# Altium PCB BioZ.PcbDoc (part 3 of 3)
Units mm, origin at the board's own origin, x right, y up, seen from the top; angles counter-clockwise.
Board outline 88 x 75 mm, 4 copper layers (Top Layer, GND1, GND 2, Bottom Layer), stack 1.564 mm thick; 174 components, 106 nets, 519 pads, 307 vias.
Unrouted connection lines stored in the file: 5.
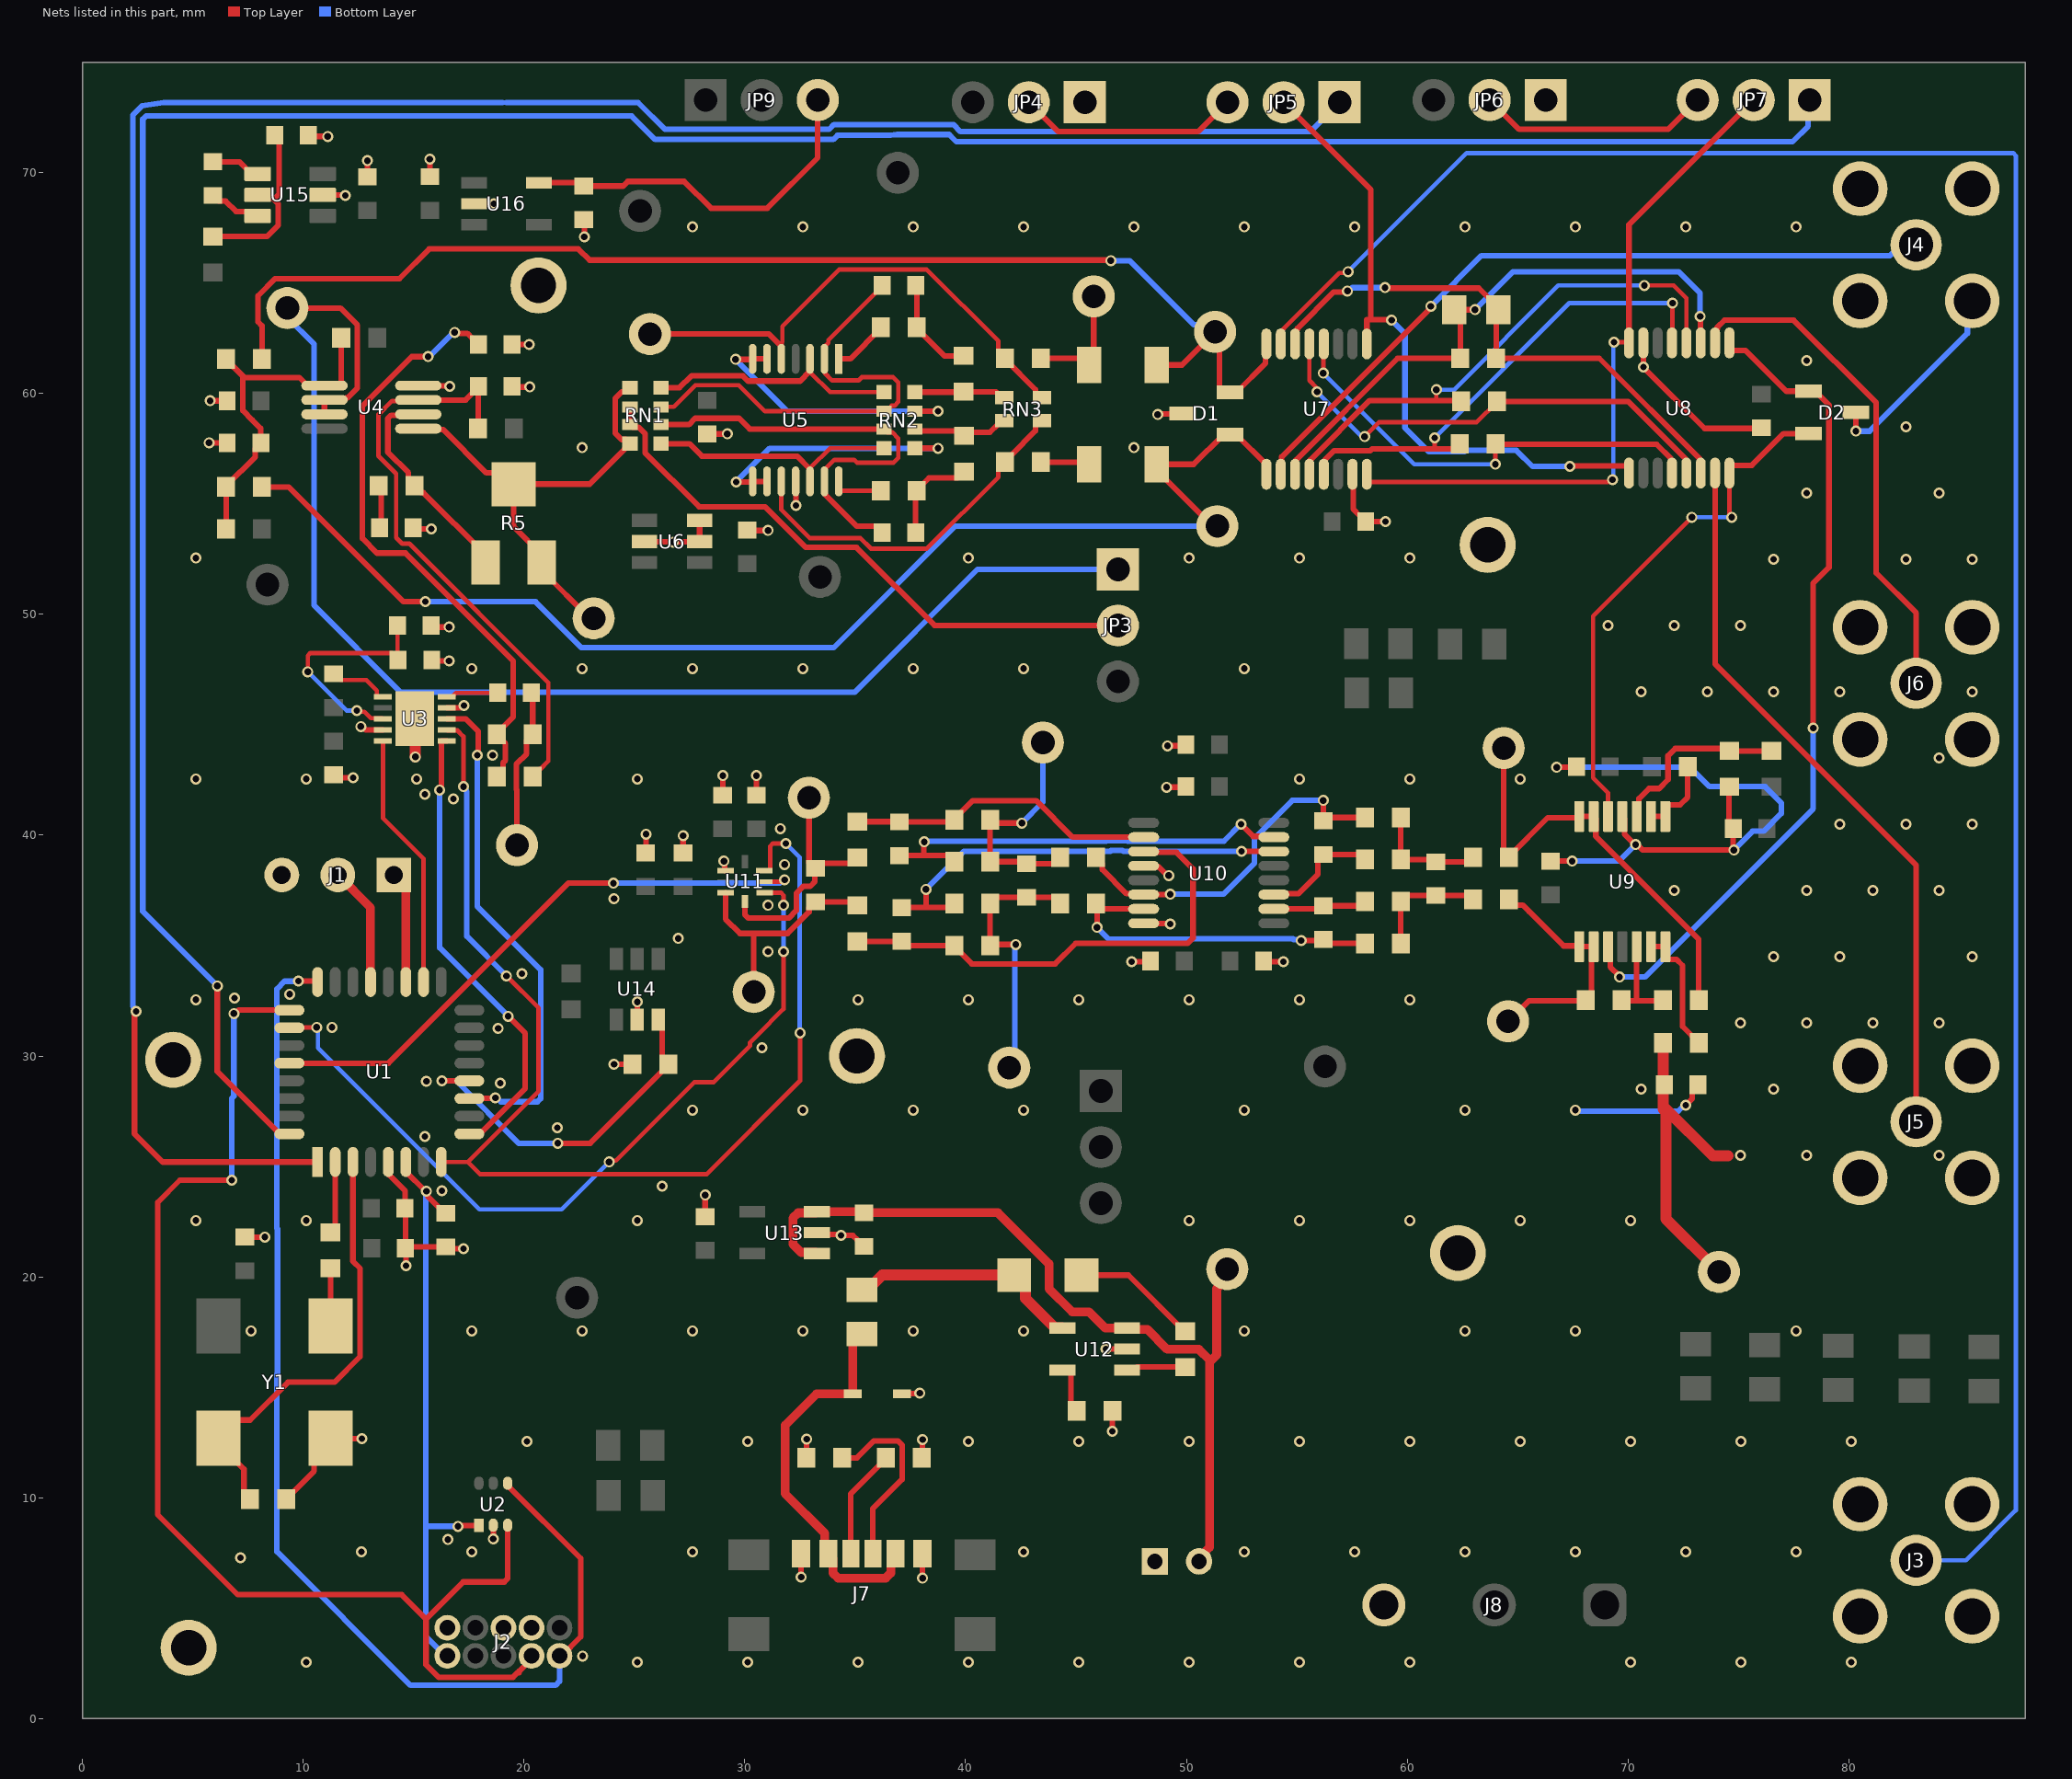
[diagram p4: the nets of this part, all layers, seen from the top]

## Via types
v1: diameter 0.5, hole 0.3, Top Layer to Bottom Layer, tented both sides, 307 vias

## Nets (pads, with @x,y where several pads share a name; then routed paths per layer and width w, separated by ;. In a path a pad name is that pad's centre, name@x,y a point inside that pad or via, vN(x,y) a via of type N, cw(c..) or ccw(c..) an arc to the next point about the centre after c; other vN are vias at no path point) (continued)
+V_BAT: C42.1 P1.2 U12.3 U13.1 U13.3 V_BAT.1 | length 38.7
  Top Layer w0.4: U13.1@33.262,21.05 33.208,21.104 32.546,21.104 32.175,21.475 32.175,22.662 32.409,22.896 33.208,22.896 U13.3@33.262,22.95 35.35,22.95 C42.1@35.4,22.9 41.466,22.9 43.775,20.591 43.775,19.459 44.823,18.411 45.589,18.411 46.325,17.675 U12.3@47.312,17.675 47.366,17.621 48.229,17.621 49.131,16.719 50.56,16.719 51.05,16.229 ; P1.2@50.575,7.11 50.575,7.269 51.05,7.744 51.05,16.229 ; V_BAT.1@51.85,20.35 51.85,19.943 51.375,19.468 51.375,16.463 51.141,16.229 51.05,16.229
+V_USB: D4.1 F1.2 U12.4 | length 10.7
  Top Layer w0.5: F1.2@35.305,19.4 35.4,19.4 35.548,19.4 36.223,20.075 D4.1@42.201,20.075 42.713,19.563 42.713,19.017 44.051,17.679 44.384,17.679 U12.4@44.388,17.675
A0: JP5.2 U7.1 U8.1 | length 30.1
  Top Layer w0.254: JP5.2@54.4,73.2 58.356,69.244 58.356,63.35 ; U7.1@58.175,62.25 58.175,63.35 58.356,63.35 ; v1(59.3,63.325) 59.275,63.35 58.356,63.35 ; v1(67.375,56.7) 67.406,56.731 69.959,56.731 70.05,56.64 U8.1@70.05,56.4
  Bottom Layer w0.254: v1(59.3,63.325) 59.905,62.72 59.905,58.452 60.989,57.369 62.594,57.369 62.656,57.431 64.954,57.431 65.685,56.7 v1(67.375,56.7)
A1: JP7.2 U7.16 U8.16 | length 31.7
  Top Layer w0.2: U7.16@58.175,56.35 58.175,56.111 58.29,55.996 69.115,55.996 69.219,56.1 v1(69.3,56.1) ; v1(69.375,62.325) 70.025,62.325 U8.16@70.05,62.3
  Top Layer w0.254: U8.16@70.05,62.3 70.05,67.65 JP7.2@75.7,73.3
  Bottom Layer w0.2: v1(69.3,56.1) 69.337,56.137 69.337,62.288 v1(69.375,62.325)
BLEED: DNP11.1 DNP12.2 R14.1 R15.2 R16.1 U4.5 | length 16.8
  Top Layer w0.254: DNP11.1@6.499,53.875 R15.2@6.499,55.775 6.499,55.813 7.82,57.134 7.82,57.521 DNP12.2@8.074,57.775 8.06,57.789 8.06,58.426 7.688,58.798 7.258,59.228 7.258,60.778 6.499,61.537 R14.1@6.499,61.575 7.349,60.725 9.819,60.725 10.181,60.363 11.622,60.363 11.712,60.454 R16.1@11.712,62.525
CAL_CAP_NEG: C22.1 R19.1 U7.6 U8.6 | length 25.1
  Top Layer w0.254: U7.6@54.925,62.25 54.925,62.778 55.023,62.876 55.023,62.954 56.672,64.603 57.253,64.603 v1(57.3,64.65) ; v1(59,64.8) 59.023,64.777 63.248,64.777 64.125,63.9 C22.1@64.125,63.8 64.038,63.713 R19.1@64.038,61.6 68.706,61.6 73.262,57.043 73.262,56.438 U8.6@73.3,56.4
  Bottom Layer w0.254: v1(57.3,64.65) 57.367,64.65 57.517,64.8 v1(59,64.8)
CAL_CAP_POS: C22.2 R19.2 U7.11 U8.11 | length 26.9
  Top Layer w0.254: U7.11@54.925,56.35 54.963,56.388 54.963,56.993 59.569,61.6 R19.2@62.412,61.6 62.412,63.513 C22.2@62.125,63.8 v1(63.071,63.8) ; v1(73.275,63.5) 73.287,63.488 73.287,62.313 U8.11@73.3,62.3
  Bottom Layer w0.254: v1(63.071,63.8) 64.796,65.525 72.3,65.525 73.275,64.55 v1(73.275,63.5)
CAL_HIGH_NEG: R18.1 U7.5 U8.5 | length 22.3
  Top Layer w0.2: U7.5@55.575,62.25 55.575,60.6 55.93,60.245 55.93,60.08 v1(55.925,60.075) ; v1(58.075,58.05) 58.731,58.706 63.157,58.706 64.063,59.612 R18.1@64.063,59.65
  Top Layer w0.254: R18.1@64.063,59.65 70.006,59.65 72.612,57.043 72.612,56.438 U8.5@72.65,56.4
  Bottom Layer w0.2: v1(55.925,60.075) 57.9,58.1 58.025,58.1 v1(58.075,58.05)
CAL_HIGH_POS: R18.2 U7.12 U8.12 | length 24.6
  Top Layer w0.2: 61.325,59.688 v1(61.325,60.175) ; v1(70.75,64.9) 72.075,64.9 72.65,64.325 U8.12@72.65,62.3
  Top Layer w0.254: U7.12@55.575,56.35 55.613,56.388 55.613,56.993 58.307,59.688 61.325,59.688 62.399,59.688 R18.2@62.437,59.65
  Bottom Layer w0.2: v1(61.325,60.175) 62.125,60.175 66.85,64.9 v1(70.75,64.9)
CAL_LOW_NEG: R17.1 U7.4 U8.4 | length 20.7
  Top Layer w0.2: v1(56.2,60.925) 56.212,60.937 56.212,62.238 U7.4@56.225,62.25 ; v1(64,56.8) 64,57.712 R17.1@64.013,57.725
  Top Layer w0.254: R17.1@64.013,57.725 64.032,57.706 71.3,57.706 71.962,57.043 71.962,56.438 U8.4@72,56.4
  Bottom Layer w0.2: v1(56.2,60.925) 60.325,56.8 v1(64,56.8)
CAL_LOW_POS: R17.2 U7.13 U8.13 | length 22.7
  Top Layer w0.2: 61.25,57.499 v1(61.25,58) ; U8.13@72,62.3 72.013,62.313 72.013,64.087 v1(72.025,64.1)
  Top Layer w0.254: U7.13@56.225,56.35 56.263,56.388 56.263,56.993 56.688,57.419 58.336,57.419 58.417,57.499 61.25,57.499 62.2,57.499 R17.2@62.387,57.687
  Bottom Layer w0.2: v1(61.25,58) 67.35,64.1 v1(72.025,64.1)
EXC_EXT_NEG: J3.SIG U7.7 | length 104.1
  Top Layer w0.2: U7.7@54.275,62.25 54.275,62.793 54.4,62.918 54.4,62.942 56.925,65.468 57.268,65.468 v1(57.325,65.525)
  Bottom Layer w0.2: v1(57.325,65.525) 62.694,70.894 87.458,70.894 87.575,70.776 87.575,9.424 85.311,7.16 J3.SIG@83.06,7.16
EXC_EXT_POS: J4.SIG U7.10 | length 33.6
  Top Layer w0.254: U7.10@54.275,56.35 54.313,56.388 54.313,57.132 61.071,63.89 v1(61.071,63.95)
  Bottom Layer w0.254: v1(61.071,63.95) 63.371,66.25 81.876,66.25 81.969,66.344 82.664,66.344 J4.SIG@83.06,66.74
FSYNC/SPI1_NSS1: U1.11 U3.8 | length 22.9
  Top Layer w0.254: U3.8@16.495,45.275 17.35,45.275 17.922,44.703 17.922,43.672 v1(17.875,43.625) ; U1.11@17.518,28.075 17.531,28.088 18.688,28.088 v1(18.7,28.1)
  Bottom Layer w0.254: v1(17.875,43.625) 17.875,36.78 20.75,33.905 20.75,28.075 20.601,27.926 18.941,27.926 18.767,28.1 v1(18.7,28.1)
GND: C1.1 C2.2 C3.1 C4.2 C5.2 C7.2 C9.2 C10.2 C11.2 C12.2 C13.1 C16.2 C19.2 C20.2 C21.2 C23.2 C24.2 C27.2 C28.2 C32.2 C33.2 C36.2 C37.2 C38.2 C39.2 C40.2 C41.2 C42.2 C43.2 C44.1 C46.2 C47.2 C48.2 D1.3 D2.3 D3.2 DNP12.1 GND.1 J1.3 J2.3 J2.5 J2.9 J3.SHLD J4.SHLD J7.A12 J7.B12 J8.3 JP4.1 JP6.1 P1.1 R7.1 R38.1 R40.2 R41.2 R43.1 R44.1 U1.5 U2.2 U3.4 U3.9 U3.11 U4.4 U5.11 U6.2 U6.3 U6.5 U7.15 U8.15 U9.11 U10.12 U10.16 U11.5 U12.2 U13.2 U14.2 U15.2 U16.2 Y1.2 | length 115.1
  Top Layer w0.254: v1(5.725,57.775) DNP12.1@6.55,57.775 ; v1(5.775,59.675) C11.2@6.55,59.675 ; C13.1@7.35,21.799 v1(8.25,21.799) ; R7.1@9.213,9.925 9.213,9.963 9.492,10.242 9.53,10.242 10.491,11.203 10.491,11.936 Y1.2@11.24,12.685 11.25,12.675 v1(12.65,12.675) ; C44.1@10.224,71.7 10.274,71.65 v1(11.1,71.65) ; U15.2@10.875,69 10.888,68.987 11.887,68.987 v1(11.9,68.975) ; C7.2@11.367,42.735 11.502,42.6 v1(12.25,42.6) ; v1(12.6,44.925) 12.667,44.925 12.817,44.775 U3.4@13.605,44.775 ; C47.2@12.9,69.824 v1(12.9,70.55) ; U1.5@13.843,25.2 13.887,25.155 13.887,24.613 14.6,23.9 C2.2@14.6,23.1 14.624,23.076 C1.1@14.624,21.3 ; v1(14.65,20.5) 14.65,21.274 C1.1@14.624,21.3 ; U3.11@14.925,45.15 U3.11@15.05,45.275 U3.11@15.075,45.25 ; C12.2@14.975,53.925 15.025,53.875 v1(15.8,53.875) ; U4.4@15.203,60.363 15.222,60.344 16.606,60.344 v1(16.625,60.325) ; C46.2@15.725,69.825 v1(15.725,70.625) ; C5.2@15.789,49.503 15.867,49.425 v1(16.6,49.425) ; C4.2@15.812,47.942 15.854,47.9 v1(16.6,47.9) ; U3.9@16.495,45.775 17.109,45.775 17.208,45.875 v1(17.275,45.875) ; v1(17.25,21.275) 16.526,21.275 C3.1@16.45,21.351 14.675,21.351 C1.1@14.624,21.3 ; U16.2@17.738,68.6 v1(18.625,68.6) ; v1(18.6,8.125) U2.2@18.6,8.75 ; C10.2@19.449,60.325 19.474,60.3 v1(20.25,60.3) ; C9.2@19.449,62.225 v1(20.225,62.225) ; C48.2@22.7,67.876 22.725,67.851 v1(22.725,67.1) ; v1(24.075,29.625) R44.1@24.912,29.625 ; U14.2@25.125,31.65 v1(25.125,32.45) ; U6.5@25.45,53.3 25.463,53.287 26.738,53.287 v1(26.75,53.275) 26.762,53.287 27.937,53.287 U6.2@27.95,53.3 U6.3@27.95,54.25 ; C36.2@25.5,39.2 25.525,39.225 v1(25.525,40.05) ; C37.2@27.2,39.2 v1(27.2,39.975) ; C43.2@28.2,22.724 v1(28.2,23.7) ; C16.2@28.3,58.176 28.301,58.175 v1(29.2,58.175) ; C38.2@28.991,41.812 29,41.821 v1(29,42.7) ; v1(29.05,38.825) 29.088,38.787 29.088,38.402 29.089,38.4 U11.5@29.125,38.4 ; C19.2@30.1,53.824 30.124,53.8 v1(31.05,53.8) ; C39.2@30.515,41.812 30.525,41.822 v1(30.525,42.7) ; U5.11@32.3,56.025 32.313,56.012 v1(32.313,54.937) ; v1(32.55,6.4) J7.B12@32.55,7.455 ; R40.2@32.787,11.8 32.8,11.813 v1(32.8,12.65) ; U13.2@33.262,22 33.34,21.922 34.303,21.922 v1(34.35,21.875) 34.895,21.875 35.108,21.662 35.108,21.63 35.362,21.376 C42.2@35.4,21.376 ; D3.2@37.118,14.7 37.131,14.713 37.912,14.713 v1(37.925,14.725) ; R41.2@38.013,11.8 38.05,11.837 v1(38.05,12.625) ; v1(38.05,6.35) J7.A12@38.05,7.455 ; v1(46.35,16.725) U12.2@47.312,16.725 ; v1(46.65,13) 46.65,13.912 R43.1@46.663,13.925 ; v1(47.525,34.275) 48.351,34.275 C27.2@48.376,34.3 ; U10.16@48.062,36.011 48.08,35.993 49.257,35.993 v1(49.275,35.975) ; U10.12@48.062,38.611 48.1,38.573 48.735,38.573 49.133,38.175 v1(49.2,38.175) ; v1(48.7,59.05) 48.725,59.075 49.805,59.075 D1.3@49.83,59.1 ; v1(49.1,42.175) 49.951,42.175 C33.2@49.976,42.2 ; v1(49.15,44.05) 49.926,44.05 C32.2@49.976,44.1 ; C28.2@53.5,34.3 53.525,34.275 v1(54.4,34.275) ; U7.15@57.525,56.35 57.563,56.312 57.563,54.761 57.832,54.492 57.87,54.492 58.124,54.238 C20.2@58.124,54.2 v1(59.025,54.2) ; v1(66.775,43.075) 67.651,43.075 C41.2@67.676,43.1 ; v1@67.45,38.825 C23.2@66.501,38.825 ; U9.11@69.75,40.85 69.848,40.752 69.848,40.044 v1@70.317,39.575 ; v1(70.35,39.575) 70.417,39.575 70.667,39.325 v1(74.8,39.325) ; U8.15@70.7,62.3 v1(70.7,61.2) 73.475,58.425 76.024,58.425 C21.2@76.05,58.451 ; v1(72.625,27.775) 72.92,28.07 72.92,28.446 C24.2@73.174,28.7 ; R38.1@74.6,42.187 74.587,42.2 74.587,40.489 C40.2@74.776,40.3 C40.2@74.776,40.3 v1@74.775,39.4 ; D2.3@80.32,59.15 80.325,59.145 v1(80.325,58.3) ; C23.2@66.5,38.824 C23.2@66.501,38.825
  Top Layer w0.5: v1(15.075,43.55) U3.11@15.075,45.25
  Bottom Layer w0.254: v1(66.775,43.075) 72.825,43.075 73.7,42.2 76.216,42.2 76.952,41.464 76.952,40.986 76.145,40.179 75.654,40.179 v1(74.8,39.325) ; v1(67.475,38.825) 69.6,38.825 v1(70.35,39.575) ; v1@67.6,27.5 72.283,27.5 72.558,27.775 v1(72.625,27.775) ; v1(80.325,58.3) 80.95,58.3 85.38,62.73 85.38,63.98 J4.SHLD@85.6,64.2
  other v1: 10.125,2.55 25.125,2.55 30.125,2.55 35.125,2.55 40.125,2.55 45.125,2.55 50.125,2.55 55.125,2.55 60.125,2.55 70.125,2.55 75.125,2.55 80.125,2.55 22.65,2.825 7.15,7.275 12.625,7.55 17.625,7.55 27.625,7.55 42.625,7.55 52.625,7.55 57.625,7.55 62.625,7.55 67.625,7.55 72.625,7.55 77.625,7.55 16.55,8.1 20.125,12.55 30.125,12.55 40.125,12.55 45.125,12.55 50.125,12.55 55.125,12.55 60.125,12.55 65.125,12.55 70.125,12.55 75.125,12.55 80.125,12.55 7.625,17.55 17.625,17.55 22.625,17.55 27.625,17.55 32.625,17.55 37.625,17.55 42.625,17.55 52.625,17.55 62.625,17.55 67.625,17.55 77.625,17.55 5.125,22.55 10.125,22.55 25.125,22.55 50.125,22.55 55.125,22.55 60.125,22.55 65.125,22.55 70.125,22.55 16.275,23.9 26.25,24.1 15.5,26.35 21.5,26.75 27.625,27.55 32.625,27.55 37.625,27.55 42.625,27.55 52.625,27.55 62.625,27.55 67.625,27.55 18.925,28.775 15.575,28.85 30.775,30.375 18.825,31.25 11.3,31.3 5.125,32.55 35.125,32.55 40.125,32.55 45.125,32.55 50.125,32.55 55.125,32.55 60.125,32.55 6.875,32.625 9.375,32.8 19.9,33.725 31.05,34.725 26.975,35.325 31.05,36.825 24.075,37.125 31.8,38.675 31.6,40.3 16.8,41.65 15.5,41.85 5.125,42.55 10.125,42.55 15.125,42.55 25.125,42.55 55.125,42.55 60.125,42.55 65.125,42.55 18.575,43.625 17.625,47.55 22.625,47.55 27.625,47.55 32.625,47.55 37.625,47.55 42.625,47.55 52.625,47.55 5.125,52.55 40.125,52.55 50.125,52.55 55.125,52.55 60.125,52.55 22.625,57.55 47.625,57.55 27.625,67.55 32.625,67.55 37.625,67.55 42.625,67.55 47.625,67.55 52.625,67.55 57.625,67.55 62.625,67.55 67.625,67.55 72.625,67.55 77.625,67.55
MCLK: U1.18 U3.5 | length 11.7
  Top Layer w0.2: U3.5@13.605,44.275 13.605,40.771 15.443,38.932 U1.18@15.443,33.35
NetC4_1: C4.1 C5.1 U3.3 | length 10.8
  Top Layer w0.2: v1(10.2,47.404) 10.2,48.133 10.317,48.25 14.007,48.25 14.288,47.969 C4.1@14.288,47.942 ; v1(12.425,45.65) 12.482,45.593 12.766,45.593 13.056,45.302 13.577,45.302 U3.3@13.605,45.275 ; C4.1@14.265,47.965 C5.1@14.265,49.503
  Bottom Layer w0.2: v1(10.2,47.404) 11.954,45.65 v1(12.425,45.65)
NetC6_2: C6.2 U3.1 | length 2.8
  Top Layer w0.2: C6.2@11.367,47.307 11.405,47.307 11.686,47.026 12.854,47.026 13.327,46.553 13.327,46.302 13.354,46.275 U3.1@13.605,46.275
NetC8_1: C8.1 R1.1 T1.1 | length 7.2
  Top Layer w0.254: T1.1@19.675,39.55 19.675,42.049 19.654,42.07 19.654,42.938 19.654,42.97 19.654,43.23 20.108,43.684 20.108,44.296 R1.1@20.388,44.575 20.388,46.387 C8.1@20.325,46.45
NetC8_2: C8.2 U3.10 | length 2.4
  Top Layer w0.2: U3.10@16.495,46.275 16.772,46.275 16.799,46.302 16.799,46.333 16.917,46.45 C8.2@18.801,46.45
NetC9_1: C9.1 R1.2 R2.1 | length 27.9
  Top Layer w0.254: v1(15.65,61.675) 14.909,61.675 12.675,59.44 12.675,53.439 13.335,52.779 14.621,52.779 19.509,47.891 19.509,45.36 18.762,44.613 18.762,44.537 19.152,44.147 19.152,43.386 19.038,43.272 19.038,42.926 R2.1@18.762,42.65 ; v1(16.85,62.775) 16.897,62.728 17.422,62.728 17.633,62.517 17.671,62.517 17.925,62.263 C9.1@17.925,62.225
  Bottom Layer w0.254: v1(15.65,61.675) 15.7,61.675 16.8,62.775 v1(16.85,62.775)
NetC10_1: C10.1 R2.2 R3.1 U4.3 | length 27
  Top Layer w0.2: U4.3@15.203,59.713 15.155,59.665 14.011,59.665 13.399,59.054 13.399,57.172 14.198,56.373 14.198,53.477 14.47,53.206 14.798,53.206 21.094,46.91 21.094,43.356 20.732,42.994 20.694,42.994 20.388,42.688 R2.2@20.388,42.65
  Top Layer w0.254: U4.3@15.203,59.713 17.351,59.713 C10.1@17.912,60.274 ; R3.1@17.912,58.425 C10.1@17.912,60.274 ; C10.1@17.925,60.325 17.912,60.312 C10.1@17.912,60.274
NetC12_1: C12.1 R4.1 | length 2
  Top Layer w0.254: R4.1@13.408,55.832 13.525,55.715 13.525,53.999 C12.1@13.451,53.925
NetC14_1: C14.1 RN1.7 RN2.2 U5.2 | length 21.4
  Top Layer w0.2: RN1.7@26.2,59.4 26.776,59.4 27.303,59.928 27.757,60.381 29.73,60.381 30.911,59.2 RN2.2@36.3,59.2 36.4,59.2 36.65,59.45 36.774,59.45 36.95,59.626 36.95,60.514 36.722,60.742 35.292,60.742 35.148,60.598 33.955,60.598 33.627,60.926 33.627,61.548 U5.2@33.6,61.575 33.6,62.121 33.78,62.3 33.78,62.428 36.214,64.862 C14.1@36.214,64.9
NetC14_2: C14.2 R8.2 R9.1 | length 4.6
  Top Layer w0.254: C14.2@37.738,64.9 37.789,64.849 R8.2@37.789,63 37.789,62.962 39.038,61.713 R9.1@39.9,61.713
NetC15_1: C15.1 RN1.6 RN2.3 U5.13 | length 20.3
  Top Layer w0.2: U5.13@33.6,56.025 33.6,56.547 34.055,57.002 34.948,57.002 35.075,56.875 36.739,56.875 36.95,57.086 36.95,57.974 36.674,58.25 36.45,58.25 RN2.3@36.3,58.4
  Top Layer w0.254: RN1.6@26.2,58.6 27.461,58.6 27.745,58.884 29.738,58.884 30.222,58.4 RN2.3@36.3,58.4 ; U5.13@33.6,56.025 33.617,56.008 33.617,55.447 35.072,53.992 35.96,53.992 36.214,53.738 C15.1@36.214,53.7
NetC15_2: C15.2 R10.2 R11.1 | length 4.4
  Top Layer w0.254: C15.2@37.738,53.7 37.738,55.549 R10.2@37.789,55.6 37.789,55.638 38.333,56.183 39.646,56.183 R11.1@39.925,56.462
NetC17_1: C17.1 R12.2 T4.1 | length 5.5
  Top Layer w0.254: R12.2@43.413,61.6 45.3,61.6 C17.1@45.6,61.3 45.8,61.5 T4.1@45.8,64.4
NetC17_2: C17.2 D1.2 R14.2 T5.1 U7.8 | length 58.2
  Top Layer w0.254: R14.2@8.125,61.575 8.125,63.068 7.942,63.252 7.942,64.427 8.723,65.209 14.357,65.209 15.7,66.551 22.458,66.551 22.963,66.046 46.554,66.046 v1(46.575,66.025) ; C17.2@48.648,61.3 49.8,61.3 T5.1@51.3,62.8 51.492,62.608 51.492,60.238 51.67,60.06 D1.2@51.97,60.06 52.27,60.06 53.587,61.377 53.587,62.212 U7.8@53.625,62.25
  Bottom Layer w0.254: v1(46.575,66.025) 47.425,66.025 50.334,63.116 50.984,63.116 T5.1@51.3,62.8
NetC18_1: C18.1 R13.2 | length 2.2
  Top Layer w0.254: R13.2@43.413,56.9 45.5,56.9 C18.1@45.6,56.8
NetC18_2: C18.2 D1.1 R15.1 T6.1 U7.9 | length 59.2
  Top Layer w0.254: R15.1@8.125,55.775 9.331,55.775 14.531,50.575 v1(15.525,50.575) ; T6.1@51.4,54 51.173,54 48.648,56.525 C18.2@48.648,56.8 50.33,56.8 51.67,58.14 D1.1@51.97,58.14 52.27,58.14 53.625,56.785 U7.9@53.625,56.35
  Bottom Layer w0.254: v1(15.525,50.575) 20.514,50.575 22.598,48.492 34.021,48.492 39.53,54 T6.1@51.4,54
NetC25_1: C25.1 R24.2 R27.1 R28.1 | length 5.3
  Top Layer w0.254: R28.1@59.713,40.8 R27.1@59.713,38.9 61.193,38.9 C25.1@61.299,38.794 62.781,38.794 R24.2@62.987,39
NetC25_2: C25.2 R23.2 R25.1 R26.1 | length 5.4
  Top Layer w0.254: R25.1@59.713,35.1 R26.1@59.713,37 59.983,37.27 62.817,37.27 R23.2@62.987,37.1
NetC26_1: C26.1 R26.2 U10.2 | length 4.3
  Top Layer w0.254: U10.2@53.962,36.661 56.061,36.661 C26.1@56.2,36.8 57.887,36.8 R26.2@58.087,37
NetC26_2: C26.2 R25.2 R29.1 U10.15 | length 15.8
  Top Layer w0.254: R29.1@45.913,36.9 R29.1@45.95,36.863 ; v1(45.95,35.825) R29.1@45.95,36.863 ; U10.15@48.062,36.661 46.152,36.661 R29.1@45.95,36.863 ; v1(55.2,35.225) 56.149,35.225 C26.2@56.2,35.276 56.376,35.1 R25.2@58.087,35.1
  Bottom Layer w0.254: v1(45.95,35.825) 46.477,35.298 50.221,35.298 50.229,35.306 54.827,35.306 54.861,35.272 55.153,35.272 v1(55.2,35.225)
NetC29_1: C29.1 R27.2 U10.3 | length 5.4
  Top Layer w0.254: U10.3@53.962,37.311 54,37.349 55.074,37.349 55.95,38.225 55.95,38.876 C29.1@56.2,39.126 57.861,39.126 R27.2@58.087,38.9
NetC29_2: C29.2 R28.2 R30.1 U10.14 | length 16.5
  Top Layer w0.254: R30.1@45.913,39 46.192,38.721 46.192,38.44 47.284,37.349 48.024,37.349 U10.14@48.062,37.311 48.069,37.318 49.268,37.318 v1(49.275,37.325) ; v1(56.2,41.575) C29.2@56.2,40.65 56.35,40.8 R28.2@58.087,40.8
  Bottom Layer w0.254: v1(49.275,37.325) 51.675,37.325 53.077,38.727 53.077,39.852 54.8,41.575 v1(56.2,41.575)
NetC30_1: C30.1 R30.2 R33.1 R34.1 T13.1 | length 10.8
  Top Layer w0.254: v1(42.55,40.55) 41.263,40.55 R34.1@41.113,40.7 R33.1@41.113,38.8 42.673,38.8 C30.1@42.763,38.71 44.008,38.71 44.287,38.989 R30.2@44.287,39
  Bottom Layer w0.254: v1(42.55,40.55) 43.5,41.5 T13.1@43.5,44.2
NetC30_2: C30.2 R29.2 R31.1 R32.1 T12.1 | length 12.2
  Top Layer w0.254: v1(42.275,35.05) 41.163,35.05 R31.1@41.113,35 R32.1@41.113,36.9 41.113,36.906 41.392,37.186 44.008,37.186 44.287,36.906 R29.2@44.287,36.9
  Bottom Layer w0.254: T12.1@41.975,29.475 42.228,29.728 42.228,35.003 v1(42.275,35.05)
NetC31_1: C31.1 R32.2 U10.6 | length 19.8
  Top Layer w0.254: C31.1@37.1,36.724 38.206,36.724 ; v1(38.2,37.55) 38.206,37.544 38.206,36.724 ; R32.2@39.487,36.9 39.311,36.724 38.206,36.724 ; v1(52.5,39.275) 52.507,39.268 53.955,39.268 U10.6@53.962,39.261
  Bottom Layer w0.254: v1(38.2,37.55) 39.925,39.275 46.558,39.275 46.589,39.306 47.111,39.306 47.142,39.275 v1(52.5,39.275)
NetC31_2: C31.2 R31.2 R35.1 U10.11 | length 21.8
  Top Layer w0.254: R35.1@35.1,35.187 37.087,35.187 C31.2@37.1,35.2 37.3,35 R31.2@39.487,35 39.487,34.962 40.275,34.174 44.053,34.174 44.979,35.1 50.058,35.1 50.3,35.342 50.3,38.475 49.552,39.223 48.1,39.223 U10.11@48.062,39.261
NetC34_1: C34.1 R33.2 U10.7 | length 19.7
  Top Layer w0.254: C34.1@37,39.076 38.106,39.076 ; v1(38.125,39.7) 38.106,39.681 38.106,39.076 ; R33.2@39.487,38.8 39.211,39.076 38.106,39.076 ; v1(52.475,40.5) 53.026,39.949 53.924,39.949 U10.7@53.962,39.911
  Bottom Layer w0.254: v1(38.125,39.7) 38.154,39.729 46.37,39.729 46.401,39.76 47.299,39.76 47.33,39.729 51.704,39.729 v1(52.475,40.5)
NetC34_2: C34.2 R34.2 R36.1 U10.10 | length 14.1
  Top Layer w0.254: R36.1@35.1,40.613 36.987,40.613 C34.2@37,40.6 39.387,40.6 R34.2@39.487,40.7 39.487,40.738 40.315,41.566 42.971,41.566 43.194,41.566 44.849,39.911 U10.10@48.062,39.911
NetC35_1: C35.1 R35.2 T14.1 U11.7 | length 10.9
  Top Layer w0.254: U11.7@29.125,37.4 29.125,36.2 29.775,35.55 30.4,35.55 ; T14.1@30.4,32.9 30.4,35.55 ; R35.2@35.1,36.813 34.937,36.976 33.162,36.976 32.908,36.722 32.908,36.525 31.933,35.55 30.4,35.55
NetC35_2: C35.2 R36.2 T15.1 U11.8 | length 11
  Top Layer w0.254: U11.8@30,37 30,36.399 30.151,36.248 31.989,36.248 32.327,36.586 32.327,37.366 32.645,37.684 32.959,37.684 33.162,37.887 33.162,38.462 C35.2@33.2,38.5 ; T15.1@32.9,41.7 32.908,41.692 32.908,38.754 C35.2@33.162,38.5 ; C35.2@33.238,38.5 33.463,38.725 34.838,38.725 R36.2@35.1,38.987
NetC44_2: C44.2 R45.2 U15.5 | length 8.3
  Top Layer w0.254: R45.2@5.9,67.113 8.347,67.113 8.852,67.618 8.852,68.604 8.608,68.848 8.077,68.848 U15.5@7.925,69 ; 8.654,68.802 8.906,69.054 8.906,71.494 C44.2@8.7,71.7
NetC45_1: C45.1 U15.6 | length 2.4
  Top Layer w0.254: C45.1@5.9,68.976 6.153,68.723 6.477,68.723 6.952,68.248 7.727,68.248 U15.6@7.925,68.05
NetC45_2: C45.2 U15.4 | length 2.3
  Top Layer w0.254: C45.2@5.9,70.5 7.1,70.5 7.65,69.95 U15.4@7.925,69.95
NetC48_1: C48.1 JP9.3 U16.5 | length 16.9
  Top Layer w0.254: U16.5@20.662,69.55 22.55,69.55 C48.1@22.7,69.4 24.489,69.4 24.698,69.608 27.247,69.608 28.462,68.394 31.011,68.394 33.3,70.683 JP9.3@33.3,73.3
NetD2_1: D2.1 U8.9 U9.3 | length 37.9
  Top Layer w0.254: U9.3@69.1,34.95 69.198,34.852 69.198,34.04 69.625,33.613 v1(69.625,33.575) ; U8.9@74.6,62.3 74.6,62.043 74.691,61.952 75.336,61.952 77.178,60.11 D2.1@78.18,60.11 78.48,60.11 79.112,59.478 79.112,52.13 78.4,51.418 v1(78.4,44.85)
  Bottom Layer w0.254: v1(69.625,33.575) 70.775,33.575 78.4,41.2 v1(78.4,44.85)
NetD2_2: D2.2 U8.8 U9.12 | length 24
  Top Layer w0.2: U9.12@69.1,40.85 69.1,41.921 68.425,42.596 68.425,49.925 v1(72.9,54.4) ; U8.8@74.6,56.529 U8.8@74.6,56.4 74.6,54.581 74.7,54.481 v1(74.7,54.4)
  Top Layer w0.254: U8.8@74.6,56.529 74.6,56.657 74.691,56.748 75.61,56.748 77.052,58.19 D2.2@78.18,58.19
  Bottom Layer w0.2: v1(72.9,54.4) v1(74.7,54.4)
NetD3_1: D3.1 F1.1 J7.A9 J7.B9 | length 17.9
  Top Layer w0.4: F1.1@35.305,17.4 34.882,16.977 D3.1@34.882,14.7 33.25,14.7 31.825,13.275 31.825,10.175 33.624,8.376 33.624,7.612 33.986,7.249 33.986,6.584 34.221,6.35 36.379,6.35 36.614,6.584 36.614,7.264 J7.A9@36.85,7.5
NetD4_2: D4.2 R42.2 | length 5.8
  Top Layer w0.254: D4.2@45.249,20.075 47.375,20.075 49.912,17.538 R42.2@49.95,17.538
NetJ7_A5: J7.A5 R41.1 | length 5
  Top Layer w0.254: J7.A5@34.8,7.455 34.8,10.175 36.387,11.762 R41.1@36.387,11.8
NetJ7_B5: J7.B5 R40.1 | length 8.6
  Top Layer w0.254: R40.1@34.413,11.8 35.074,11.8 35.845,12.571 36.929,12.571 37.121,12.38 37.121,10.826 35.8,9.505 J7.B5@35.8,7.455
NetJP3_2: JP3.2 RN1.2 RN1.3 | length 27.2
  Top Layer w0.254: RN1.2@24.8,59.4 RN1.3@24.8,58.6 24.923,58.477 25.185,58.477 25.477,58.185 25.477,57.321 27.921,54.877 30.915,54.877 32.758,53.034 35.052,53.034 38.586,49.5 JP3.2@46.9,49.5
NetJP4_2: JP4.2 JP5.3 | length 10.1
  Top Layer w0.254: JP4.2@42.86,73.2 44.194,71.867 50.527,71.867 JP5.3@51.86,73.2
NetJP5_1: JP5.1 U1.1 | length 111
  Top Layer w0.254: v1(2.425,32.025) 2.35,31.95 2.35,26.475 3.625,25.2 U1.1@10.643,25.2
  Bottom Layer w0.254: v1(2.425,32.025) 2.425,32.092 2.271,32.246 2.271,72.614 2.686,73.029 3.675,73.175 19.025,73.175 ; 19.199,73.183 25.164,73.183 26.381,71.967 33.814,71.967 34.035,72.187 39.447,72.187 39.768,71.867 55.607,71.867 JP5.1@56.94,73.2
NetJP6_2: JP6.2 JP7.3 | length 10.5
  Top Layer w0.254: JP6.2@63.74,73.3 65.073,71.967 71.827,71.967 JP7.3@73.16,73.3
NetJP7_1: JP7.1 U1.32 | length 126.6
  Top Layer w0.254: v1(6.1,33.175) 6.1,29.302 8.927,26.475 U1.32@9.368,26.475
  Bottom Layer w0.254: v1(6.1,33.175) 2.725,36.55 2.725,72.426 2.874,72.575 24.875,72.575 25.937,71.513 34.002,71.513 34.192,71.702 36.612,71.702 cw(c36.9,70.4) 36.9,71.733 39.259,71.733 39.333,71.659 39.58,71.413 77.463,71.413 78.165,72.115 78.165,73.225 JP7.1@78.24,73.3
NetR4_2: R4.2 R5.1 U4.2 | length 9.9
  Top Layer w0.254: U4.2@15.203,59.063 15.166,59.025 13.975,59.025 13.826,58.877 13.826,57.349 14.754,56.421 14.754,56.111 R4.2@15.034,55.832 15.034,55.794 15.313,55.514 15.438,55.514 18.255,52.697 R5.1@18.255,52.347
NetR5_2: R5.2 R5.3 RN1.1 RN1.4 T2.1 U4.1 | length 22.4
  Top Layer w0.254: U4.1@15.203,58.413 15.241,58.375 16.325,58.375 18.293,56.407 19.021,56.407 R5.2@19.525,55.903 ; T2.1@23.15,49.825 22.967,49.825 20.795,51.997 R5.3@20.795,52.347 20.795,52.697 19.525,53.967 R5.2@19.525,55.903 ; RN1.1@24.8,60.27 24.607,60.077 24.415,60.077 24.123,59.785 24.123,58.215 24.415,57.923 24.607,57.923 RN1.4@24.8,57.73 24.77,57.73 24.577,57.537 24.577,57.507 22.973,55.903 R5.2@19.525,55.903
NetR6_2: R6.2 Y1.3 | length 2.6
  Top Layer w0.254: R6.2@11.225,20.387 11.24,20.372 Y1.3@11.24,17.765
NetR8_1: R8.1 U5.1 | length 2.5
  Top Layer w0.254: U5.1@34.25,61.575 34.776,61.575 36.163,62.962 R8.1@36.163,63
NetR9_2: R9.2 RN2.8 RN3.1 | length 4.2
  Top Layer w0.254: RN2.8@37.7,60.07 39.883,60.07 R9.2@39.9,60.087 41.368,60.087 41.63,59.825 RN3.1@41.743,59.825
NetR10_1: R10.1 U5.14 | length 2.3
  Top Layer w0.2: U5.14@34.25,56.025 34.25,55.665 34.315,55.6 R10.1@36.163,55.6
NetR11_2: R11.2 RN2.6 RN3.2 | length 4.5
  Top Layer w0.254: RN2.6@37.7,58.4 37.783,58.317 39.696,58.317 R11.2@39.99,58.022 ; R11.2@39.925,58.088 40.087,58.25 41.105,58.25 41.452,58.596 41.63,58.775 RN3.2@41.743,58.775
NetR12_1: R12.1 RN3.4 T3.1 U5.5 | length 23.3
  Top Layer w0.2: U5.5@31.65,62.098 31.677,62.125 31.677,62.337 31.696,62.356 31.696,63.05 34.265,65.619 38.243,65.619 41.481,62.381 41.481,61.906 R12.1@41.787,61.6
  Top Layer w0.254: T3.1@25.7,62.7 31.086,62.7 31.633,62.153 31.633,61.592 U5.5@31.65,61.575 ; R12.1@41.787,61.6 41.787,61.562 43.165,60.184 43.165,60.004 43.344,59.825 RN3.4@43.457,59.825
NetR13_1: R13.1 RN3.3 U5.10 | length 16.6
  Top Layer w0.2: U5.10@31.65,56.025 31.65,54.746 32.935,53.461 35.229,53.461 35.709,52.981 38.243,52.981 41.481,56.219 41.481,56.594 R13.1@41.787,56.9
  Top Layer w0.254: R13.1@41.787,56.9 41.787,56.938 42.067,57.218 43.165,58.316 43.165,58.596 43.344,58.775 RN3.3@43.457,58.775
NetR20_1: R20.1 R21.2 U9.5 | length 4.3
  Top Layer w0.254: R20.1@69.713,32.525 69.713,32.506 70.4,32.506 ; U9.5@70.4,34.95 70.4,32.506 ; R21.2@71.587,32.525 71.568,32.506 70.4,32.506
NetR20_2: R20.2 R23.1 T9.1 U9.1 U9.2 | length 11.2
  Top Layer w0.254: T9.1@64.575,31.575 64.599,31.575 65.53,32.506 68.068,32.506 68.352,32.79 U9.2@68.352,34.95 ; R23.1@64.613,37.1 64.873,36.84 65.235,36.84 65.525,36.55 67.087,34.988 67.762,34.988 U9.1@67.8,34.95 U9.2@68.45,34.95
NetR21_1: R21.1 R24.1 T10.1 U9.13 U9.14 | length 20
  Top Layer w0.254: T10.1@64.375,43.95 64.375,39.238 R24.1@64.613,39 64.613,39.038 66.365,40.79 67.74,40.79 U9.14@67.8,40.85 U9.13@68.45,40.85 68.548,40.752 68.548,39.952 73.213,35.288 R21.1@73.213,32.525
NetR22_1: R22.1 U9.6 U9.7 | length 5.9
  Top Layer w0.254: U9.6@71.05,34.95 U9.7@71.7,34.95 71.7,34.475 71.798,34.377 72.202,34.377 72.475,34.104 72.475,31.338 R22.1@73.213,30.6
NetR37_1: R37.1 R38.2 U9.10 | length 8.5
  Top Layer w0.254: U9.10@70.4,40.85 70.498,40.948 70.498,41.656 70.957,42.115 71.416,42.115 71.821,42.52 71.821,43.598 72.149,43.925 74.487,43.925 R38.2@74.6,43.813 R37.1@76.5,43.813
NetR39_1: R39.1 U9.8 U9.9 | length 3.6
  Top Layer w0.254: U9.9@71.05,40.85 U9.8@71.7,40.85 71.7,41.276 71.798,41.374 72.361,41.374 72.713,41.726 R39.1@72.713,43.1
NetR42_1: R42.1 U12.1 | length 2.7
  Top Layer w0.254: U12.1@47.312,15.775 47.645,15.775 47.782,15.912 R42.1@49.95,15.912
NetR43_2: R43.2 U12.5 | length 2.3
  Top Layer w0.254: U12.5@44.388,15.775 44.648,15.775 44.775,15.648 44.775,14.187 R43.2@45.037,13.925
NetR44_2: R44.2 U1.12 U14.3 | length 16.4
  Top Layer w0.254: v1(16.275,28.875) U1.12@17.518,28.875 ; v1(21.525,26.05) 23.001,26.05 26.538,29.587 R44.2@26.538,29.625 26.258,29.904 26.258,30.083 26.25,30.091 26.25,31.128 26.248,31.13 26.248,31.277 26.075,31.45 U14.3@26.075,31.65
  Bottom Layer w0.254: v1(16.275,28.875) 16.925,28.875 19.75,26.05 v1(21.525,26.05)
NetRN1_5: RN1.5 RN2.4 U5.12 | length 11.5
  Top Layer w0.2: U5.12@32.977,56.65 33.856,57.53 RN2.4@36.3,57.53
  Top Layer w0.254: RN1.5@26.2,57.73 27.483,57.73 28.047,57.166 32.369,57.166 32.933,56.602 32.933,56.041 U5.12@32.95,56.025
NetRN1_8: RN1.8 RN2.1 U5.3 | length 11.2
  Top Layer w0.2: U5.3@32.977,60.95 33.856,60.07 RN2.1@36.3,60.07
  Top Layer w0.254: RN1.8@26.2,60.27 27.042,60.27 27.58,60.808 29.907,60.808 30.144,60.571 32.506,60.571 32.933,60.998 32.933,61.205 U5.3@32.977,61.249
NetRN2_5: RN2.5 U5.8 U5.9 | length 12.2
  Top Layer w0.254: v1(29.6,56) 30.325,56 U5.8@30.35,56.025 U5.9@31,56.025 ; RN2.5@37.7,57.53 37.703,57.527 38.748,57.527 v1(38.75,57.525)
  Bottom Layer w0.254: v1(29.6,56) 31.125,57.525 v1(38.75,57.525)
NetRN2_7: RN2.7 U5.6 U5.7 | length 12.6
  Top Layer w0.254: v1(29.575,61.55) 30.325,61.55 U5.7@30.35,61.575 U5.6@31,61.575 ; RN2.7@37.7,59.2 v1(38.75,59.2)
  Bottom Layer w0.254: v1(29.575,61.55) 31.925,59.2 v1(38.75,59.2)
NetU1_26: U1.26 U11.1 | length 36.2
  Top Layer w0.2: U1.26@9.368,31.275 9.38,31.288 10.587,31.288 v1(10.6,31.3) ; v1(23.85,25.2) 23.907,25.257 24.157,25.257 27.708,28.808 28.583,28.808 30.225,30.45 30.225,30.603 30.547,30.925 31.75,32.128 v1(31.75,34.725) ; U11.1@30.9,37.4 31.633,37.4 31.75,37.283 v1(31.75,36.825)
  Bottom Layer w0.2: v1(10.6,31.3) 10.657,31.243 10.657,30.368 17.975,23.05 21.7,23.05 v1(23.85,25.2) ; v1(31.75,34.725) v1(31.75,36.825)
NetU1_28: U1.28 U11.2 | length 26.8
  Top Layer w0.2: U11.2@30.875,37.9 31.659,37.9 31.733,37.975 v1(31.8,37.975)
  Top Layer w0.254: U1.28@9.368,29.675 13.85,29.675 22,37.825 v1(24.05,37.825)
  Bottom Layer w0.254: v1(24.05,37.825) 31.583,37.825 31.733,37.975 v1(31.8,37.975)
NRST: C3.2 J2.10 U1.6 U2.1 | length 27.1
  Top Layer w0.254: U1.6@14.643,25.2 14.643,24.759 15.527,23.875 v1(15.575,23.875) 15.622,23.828 15.622,23.665 16.412,22.875 C3.2@16.45,22.875 ; v1(17,8.7) 17.025,8.725 17.925,8.725 U2.1@17.95,8.75
  Bottom Layer w0.254: v1(15.575,23.875) 15.549,23.849 15.549,8.725 ; J2.10@16.52,2.83 16.425,2.83 15.549,3.706 15.549,8.725 ; v1(17,8.7) 15.574,8.7 15.549,8.725
OSC32_EN: R7.2 U1.3 Y1.1 | length 20.2
  Top Layer w0.254: R7.2@7.587,9.925 7.308,10.204 7.308,11.287 6.16,12.435 Y1.1@6.16,12.685 6.987,13.512 7.587,13.512 9.3,15.225 11.412,15.225 12.567,16.38 12.567,20.379 12.243,20.703 U1.3@12.243,25.2
OSC32_IN: R6.1 U1.2 | length 3.3
  Top Layer w0.254: R6.1@11.225,22.013 11.443,22.231 U1.2@11.443,25.2
SNS_EXT_NEG: J5.SIG U8.7 | length 33.2
  Top Layer w0.254: U8.7@73.95,56.4 73.95,47.753 83.06,38.643 J5.SIG@83.06,27.02
SNS_EXT_POS: J6.SIG U8.10 | length 23.1
  Top Layer w0.254: U8.10@73.95,62.3 73.95,62.828 74.048,62.926 74.048,63.004 74.371,63.327 77.515,63.327 81.252,59.59 81.252,51.873 83.06,50.065 J6.SIG@83.06,46.88
SPI1_MOSI: U1.9 U3.6 | length 21
  Top Layer w0.254: v1(16.175,42.05) 16.175,42.117 16.253,42.195 U3.6@16.253,44.275 ; U3.6@16.254,44.275 U3.6@16.495,44.275 ; U1.9@17.518,26.475 18,26.475 20.05,28.525 20.05,31.025 v1(19.275,31.8)
  Bottom Layer w0.254: v1(16.175,42.05) 16.175,34.9 v1(19.275,31.8)
SPI1_SCK: U1.8 U3.7 U11.3 | length 54.3
  Top Layer w0.2: U1.8@16.243,25.2 17.445,25.2 ; U3.7@16.495,44.775 16.523,44.748 16.978,44.748 17.25,44.476 v1(17.25,42.2) ; v1(19.2,33.625) 20.65,32.175 20.65,28.404 17.445,25.2 ; U11.3@30.875,38.4 31.125,38.4 31.15,38.425 31.15,39.508 31.267,39.625 v1(31.85,39.625) ; v1(32.5,31.05) 32.5,28.875 28.275,24.65 17.995,24.65 17.445,25.2
  Bottom Layer w0.2: v1(31.85,39.625) 32.42,39.055 32.479,38.996 32.479,31.071 v1(32.5,31.05)
  Bottom Layer w0.254: v1(17.25,42.2) 17.25,42.133 17.4,41.983 17.4,35.425 v1(19.2,33.625)
SWCLK: J2.4 U1.25 U2.3 | length 56.6
  Top Layer w0.254: v1(6.75,24.375) 4.4,24.375 3.4,23.375 3.4,9.225 7.025,5.6 14.455,5.6 15.555,4.5 ; v1(6.85,31.925) 6.917,31.925 7.067,32.075 U1.25@9.368,32.075 ; U2.3@19.25,8.637 19.25,6.331 19.101,6.182 17.237,6.182 15.555,4.5 ; J2.4@20.33,2.83 20.33,2.697 19.775,2.142 19.775,2.075 19.708,2.075 19.498,1.865 16.12,1.865 15.555,2.43 15.555,4.5
  Bottom Layer w0.254: v1(6.75,24.375) 6.75,28.076 6.85,28.176 v1(6.85,31.925)
SWDIO: J2.2 U1.24 U2.4 | length 53.7
  Top Layer w0.254: v1(9.775,33.4) 10.593,33.4 U1.24@10.643,33.35 ; U2.4@19.25,10.65 19.25,10.56 22.565,7.245 22.565,3.7 21.695,2.83 J2.2@21.6,2.83
  Bottom Layer w0.254: v1(9.775,33.4) 9.76,33.385 9.144,33.385 8.798,33.039 8.798,22.193 8.827,22.164 8.827,15.623 8.802,15.598 8.802,7.548 14.852,1.498 21.424,1.498 21.6,1.674 J2.2@21.6,2.83
UART_RX: J1.2 U1.21 | length 5.5
  Top Layer w0.4: J1.2@11.56,38.2 13.043,36.717 U1.21@13.043,33.35
UART_TX: J1.1 U1.19 | length 5.1
  Top Layer w0.4: J1.1@14.1,38.2 14.643,37.657 U1.19@14.643,33.35
V_GUARD: C24.1 J5.SHLD J6.SHLD R22.2 V_GUARD.1 | length 15.3
  Top Layer w0.254: R22.2@71.587,30.6 R22.2@71.65,30.537
  Top Layer w0.5: R22.2@71.65,30.537 71.594,30.481 71.594,28.7 71.594,27.6 ; V_GUARD.1@74.125,20.225 71.727,22.623 71.727,27.467 71.594,27.6 ; 74.529,25.471 73.856,25.471 71.727,27.6 71.594,27.6
  other v1: 75.1,25.5 78.1,25.5 84.1,25.5 70.6,28.5 76.6,28.5 75.1,31.5 78.1,31.5 81.1,31.5 84.1,31.5 76.6,34.5 79.6,34.5 85.6,34.5 72.1,37.5 78.1,37.5 81.1,37.5 84.1,37.5 79.6,40.5 82.6,40.5 85.6,40.5 84.1,43.5 70.6,46.5 73.6,46.5 76.6,46.5 79.6,46.5 85.6,46.5 69.1,49.5 72.1,49.5 75.1,49.5 76.6,52.5 82.6,52.5 85.6,52.5 78.1,55.5 84.1,55.5 82.6,58.5 78.1,61.5
VCM: JP3.1 U4.6 U4.7 VCM.1 | length 63
  Top Layer w0.254: VCM.1@9.275,63.875 11.676,63.875 12.446,63.105 12.446,60.25 12.007,59.811 11.929,59.811 11.831,59.713 U4.6@10.953,59.713 U4.7@10.953,59.063
  Bottom Layer w0.254: VCM.1@9.275,63.875 9.275,63.45 10.475,62.25 10.475,50.416 14.416,46.475 34.976,46.475 40.541,52.04 JP3.1@46.9,52.04
pads on no net: DNP1.1 DNP1.2 DNP2.1 DNP2.2 DNP3.1 DNP3.2 DNP4.1 DNP4.2 DNP5.1 DNP5.2 DNP6.1 DNP6.2 DNP7.1 DNP7.2 DNP8.1 DNP8.2 DNP9.1 DNP9.2 DNP10.1 DNP10.2 J2.6 J2.7 J2.8 J7.7 J7.8 J7.9 J7.10 U1.7 U1.10 U1.13 U1.14 U1.15 U1.16 U1.17 U1.20 U1.22 U1.23 U1.27 U1.29 U1.30 U1.31 U2.6 U7.3 U8.3 U13.4 U14.4 U16.4

## Polygon pours and split planes (outlines as drawn)
V_GUARD on Bottom Layer "V_GUARD_L04_P001" (solid, pour order 1): 68.175,32.35 68.175,38.4 66.1,38.4 66.1,47.573 73.525,63.475 73.525,64.3 78.125,64.3 86.85,55.575 86.85,22.8 73.2,22.8 73.2,32.35
V_GUARD on Top Layer "GND" (solid, pour order 0): 68.725,32.506 68.725,38.4 66.1,38.4 66.1,47.573 73.525,63.475 73.525,64.3 78.125,64.3 86.85,55.575 86.85,22.8 73.2,22.8 73.2,32.506
no net on Bottom Overlay "GND" (solid): 49.862,13.75 17.687,13.7 17.687,9.55 17.737,9.6 49.862,9.6
GND on GND 2 (split plane): 87.49,0.51 0.51,0.51 0.51,74.49 87.49,74.49
V_GUARD on GND 2 (split plane): 86.742,55.53 86.772,55.506 86.772,23.113 70.436,23.113 70.2,23.35 70.2,39.062 70.195,39.101 70.18,39.137 70.156,39.169 68.125,41.2 68.125,47.4 68.131,47.405 68.155,47.436 68.17,47.473 68.175,47.512 68.175,57.874 74.386,64.086 78.186,64.086
GND on GND1 (split plane): 87.49,0.51 0.51,0.51 0.51,74.49 87.49,74.49
V_GUARD on GND1 (split plane): 86.743,55.568 86.774,55.544 86.774,23.151 70.438,23.151 70.201,23.388 70.201,39.1 70.196,39.139 70.181,39.176 70.157,39.207 68.126,41.238 68.126,47.439 68.132,47.443 68.156,47.474 68.171,47.511 68.176,47.55 68.176,57.912 74.388,64.124 78.187,64.124

## Other copper
GND1 (plane layer: these items are gaps in the copper):
  lines w0.3: 67.975,47.6 67.975,41.175 70.05,39.1 70.05,23.325 70.375,23 86.7,23 86.925,23 86.925,55.65 86.9,55.675 86.85,55.675 78.25,64.275 74.325,64.275 68.025,57.975 68.025,47.55
GND 2 (plane layer: these items are gaps in the copper):
  lines w0.3: 67.974,47.562 67.974,41.137 70.049,39.062 70.049,23.287 70.374,22.962 86.699,22.962 86.924,22.962 86.924,55.612 86.899,55.637 86.849,55.637 78.249,64.237 74.324,64.237 68.024,57.937 68.024,47.512

## Silkscreen, mask and mechanical layers (free items; w line width, h text height)
Top Overlay:
  text "+V" at 40.721,70.404 h0.76 r90
  text "A1" at 64.196,70.404 h1.02 r90
  text "A0" at 43.171,70.354 h0.76 r90
  text "A1" at 76.171,70.254 h1.02 r90
  text "+V" at 61.796,70.004 h1.02 r90
  text "A0" at 54.946,69.954 h1.02 r90
  text "GND" at 45.971,69.604 h0.76 r90
  text "+5V" at 31.371,69.029 h1.02 r90
  text "GND" at 66.871,68.979 h1.02 r90
  text "MCU" at 57.471,68.829 h1.02 r90
  text "MCU" at 78.821,68.704 h1.02 r90
  text "5V_INT" at 34.052,66.179 h1.02 r90
  text "MANUAL" at 73.471,65.929 h1.02 r90
  text "MANUAL" at 52.146,65.904 h1.02 r90
  text "+5V_EXT" at 28.652,64.979 h1.02 r90
  text "EXC_POS" at 79.179,61.116 h1.27
  text "VCM" at 48.529,51.579 h0.76
  text "DNPS X3" at 55.429,50.054 h1.02
  text "HCP_REF" at 48.579,49.131 h0.76
  text "+2.5V" at 48.604,46.629 h0.76
  text "SNS_POS" at 79.179,40.941 h1.27
  text "RX" at 14.546,40.154 h0.76 r90
  text "TX" at 12.021,40.054 h0.76 r90
  text "GND" at 9.396,39.829 h0.76 r90
  text "+3.3V_EXT" at 47.654,28.006 h0.76
  text "+3.3V_SYS" at 47.829,25.481 h0.76
  text "+3.3V_BAT" at 47.829,22.856 h0.76
  text "SNS_NEG" at 79.104,21.141 h1.27
  text "DNPS X2" at 21.479,13.779 h1.02
  text "DNPS X5" at 76.254,12.279 h1.02
  text "GND" at 59.471,10.404 h1.02 r90
  text "+5V_EXT" at 69.477,10.179 h1.02 r90
  text "+3.3V_EXT" at 64.452,10.029 h1.02 r90
  text "GND" at 48.896,9.554 h0.76 r90
  text "+V_BAT" at 50.944,8.954 h0.76 r90
  text "SWD" at 9.004,3.304 h1.02
  text "CHARGE ONLY" at 43.371,1.954 h1.02 r90
  text "EXC_NEG" at 78.779,1.241 h1.27
  text "3.7V/4.2V ONLY" at 54.171,1.104 h1.02 r90
Bottom Overlay:
  text "BIO IMPEDANCE AFE DEV BOARD" at 71.171,26.304 h1.52
  text "VERSION A" at 71.171,22.466 h1.52
  text "LUCAS CHURCH" at 71.171,18.629 h1.52
  text "GITHUB.COM/LUCASCHURCH/BIOIMPEDANCE-AFE" at 71.171,14.792 h1.52
  text "SERIAL NUMBER:" at 71.171,10.954 h1.52